# Altium PCB STlinkv21.PcbDoc
Units mil, origin at the board's own origin, x right, y up, seen from the top; angles counter-clockwise.
Board outline 1970 x 575 mil, 2 copper layers (Top Layer, Bottom Layer); 50 components, 45 nets, 164 pads, 77 vias.
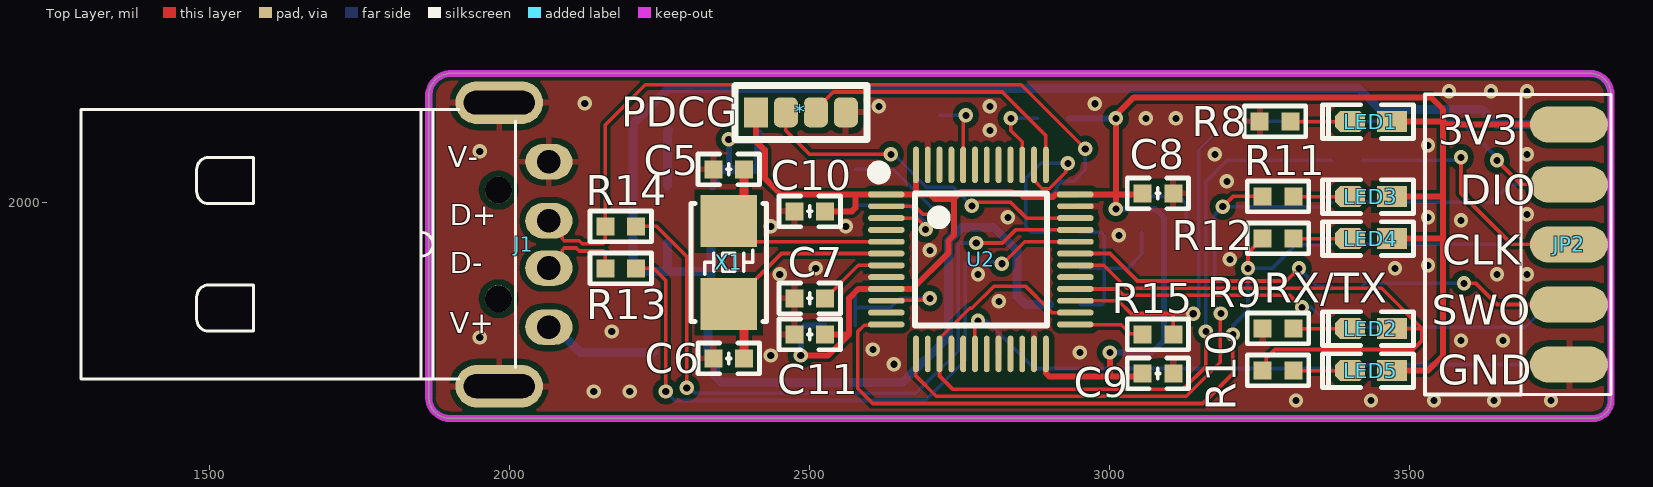
[diagram p0: Top Layer view]
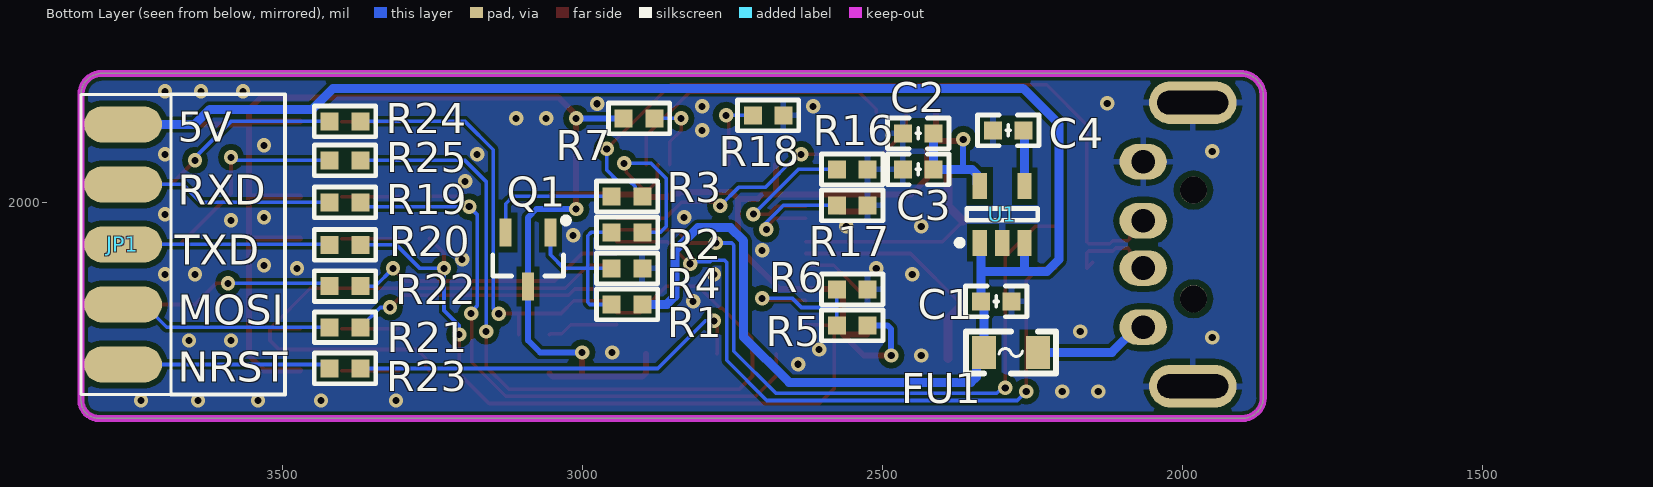
[diagram p1: Bottom Layer view, seen from below]
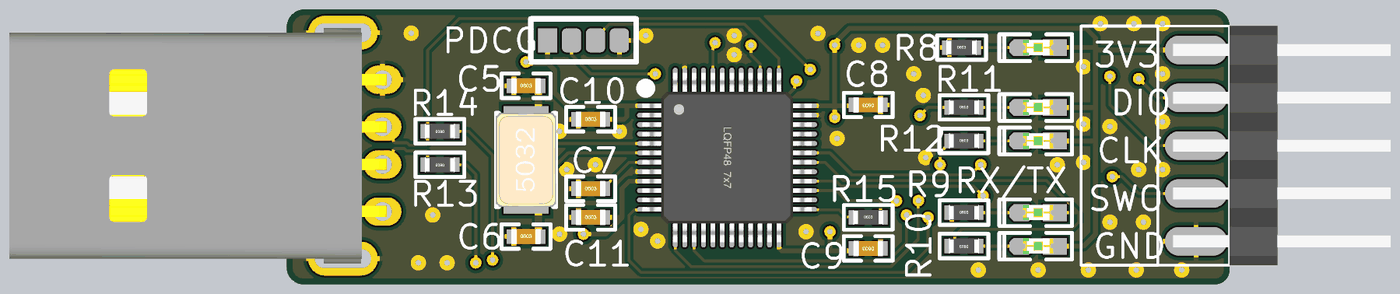
[diagram p2: 3D render of the assembled board from above, using the file's embedded part models]
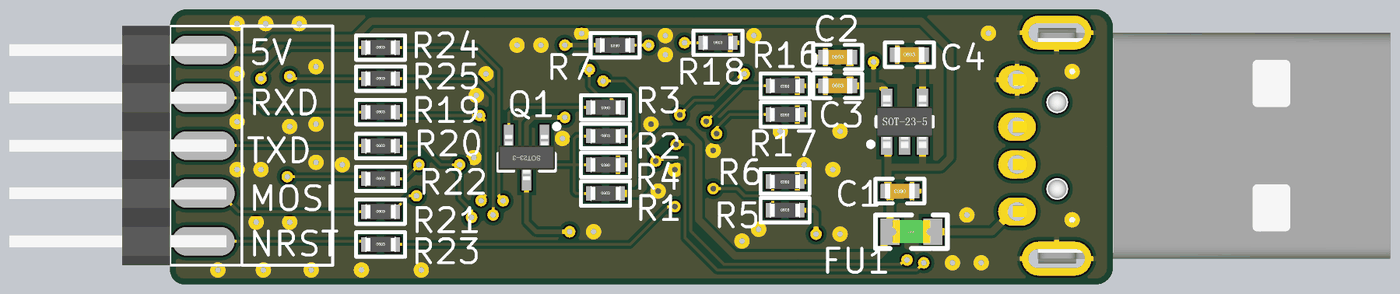
[diagram p3: 3D render of the assembled board from below, using the file's embedded part models]

## Layer stack, top to bottom
Top Solder: solder mask 0.4, Solder Resist, Dk 3.5
Top Layer: signal copper 1.4
Dielectric 1: dielectric 12.6, FR-4, Dk 4.8
Bottom Layer: signal copper 1.4
Bottom Solder: solder mask 0.4, Solder Resist, Dk 3.5

## Board outline
1865,1675 ccw(c1900,1675) 1900,1640 3805,1640 ccw(c3805,1670) 3835,1670 3835,2180 ccw(c3800,2180) 3800,2215 1905,2215 ccw(c1902.5,2177.5) 1865,2180

## Design rules (kind name [scope] priority, off if disabled: settings)
Clearance [All] p1: gap=10 ignorepadtopadclearanceinfootprint=TRUE except(0: Arc-Hole Track-Hole SMDPad-Hole THPad-Hole Via-Hole Fill-Hole Poly-Hole Region-Hole Text-Hole; 6: Arc-Arc Arc-Track Arc-SMDPad Arc-THPad Arc-Via Arc-Fill Arc-Poly Arc-Region Track-Track Track-SMDPad Track-THPad Track-Via Track-Fill Track-Poly Track-Region SMDPad-SMDPad SMDPad-THPad SMDPad-Via THPad-THPad THPad-Via Via-Via)
DiffPairsRouting [All] p1: maxlimit=10 minlimit=6 mostfreqgap=6 toplayer_minwidth=6 toplayer_maxwidth=15 toplayer_prefwidth=6 bottomlayer_minwidth=6 bottomlayer_maxwidth=15 bottomlayer_prefwidth=6 maxuncoupledlength=500
PlaneClearance [All] p1: clearance=10
PolygonConnect [All] p1: thpad.connectstyle=Relief thpad.reliefconductorwidth=10 thpad.reliefentries=4 thpad.polygonreliefangle="90 Angle" thpad.airgapwidth=10 smdpad.connectstyle=Relief smdpad.reliefconductorwidth=10 smdpad.reliefentries=4 smdpad.polygonreliefangle="90 Angle" smdpad.airgapwidth=10 via.connectstyle=Direct via.reliefconductorwidth=10 via.reliefentries=4 via.polygonreliefangle="90 Angle" via.airgapwidth=10
RoutingVias [All] p1: holewidth=12 width=24 viastyle="Through Hole" minholewidth=12 minwidth=24 maxholewidth=12 maxwidth=24
SolderMaskExpansion [All] p1: expansion=4 istentingtop=FALSE
UnRoutedNet [All] p1: checkbadconnections=TRUE
Width Width_3 [InNet('NetFU1_1')] p1: maxlimit=30 minlimit=10 preferedwidth=15
Width Width_2 [InNet('5V')] p2: maxlimit=30 minlimit=10 preferedwidth=15
Width Width_1 [InNet('3.3V')] p3: maxlimit=30 minlimit=10 preferedwidth=15
Width [InNetClass('All Nets')] p4: maxlimit=30 minlimit=6 preferedwidth=6
27 further rules are at their usual default settings.

## Classes and differential pairs
differential pair USB: +USB_P -USB_N

## Components (designator, comment, footprint, x,y, rotation, side; value= is the part's Value field where it differs from the comment)
* "JP3" JP4 2410,2150 r0 top
C1 "104" "C 0603_L" 2310,1835 r0 bottom
C2 "104" "C 0603_L" 2440,2115 r180 bottom
C3 "10uF" "C 0603_L" 2440,2055 r180 bottom
C4 "104" "C 0603_L" 2290,2120 r180 bottom
C5 "22pF" "C 0603_L" 2365,2055 r0 top
C6 "22pF" "C 0603_L" 2365,1740 r0 top
C7 "104" "C 0603_L" 2500,1840 r0 top
C8 "104" "C 0603_L" 3080,2015 r180 top
C9 "104" "C 0603_L" 3080,1715 r180 top locked
C10 "104" "C 0603_L" 2500,1985 r0 top
C11 "104" "C 0603_L" 2500,1780 r0 top
FU1 "500mA" "FU 0805" 2285.71,1750 r0 bottom
J1 "USB?" USB-A 1715,1920 r180 top
JP1 "P_BOTTOM" JP5Bottom 3765,2130 r0 top
JP2 "P_TOP" JP5TOP 3765,1730 r90 top
LED1 "RED" "LED 0603B" 3435,2135 r180 top
LED2 "橙色" "LED 0603B" 3435,1790 r180 top
LED3 "绿色" "LED 0603B" 3435,2010 r180 top
LED4 "橙色" "LED 0603B" 3435,1940 r180 top
LED5 "蓝色" "LED 0603B" 3435,1720 r180 top
Q1 "SS8050" SOT23-3N 3090,1905 r0 bottom locked
R1 "10K" "R 0603_L" 2925,1830 r180 bottom
R2 "100" "R 0603_L" 2925,1950 r180 bottom
R3 "1.5K" "R 0603_L" 2925,2010 r0 bottom
R4 "36K" "R 0603_L" 2925,1890 r0 bottom
R5 "4.7K" "R 0603_L" 2550.01,1795 r180 bottom
R6 "4.7K" "R 0603_L" 2549.99,1855 r0 bottom
R7 "4.7K" "R 0603_L" 2905,2140 r0 bottom
R8 "1K" "R 0603_L" 3275.01,2135 r0 top
R9 "1K5" "R 0603_L" 3280.01,1790 r0 top locked
R10 "1K" "R 0603_L" 3280,1720 r180 top locked
R11 "1K5" "R 0603_L" 3280.01,2010 r0 top
R12 "100" "R 0603_L" 3280,1940 r0 top
R13 "22" "R 0603_L" 2185,1890 r180 top
R14 "22" "R 0603_L" 2185,1960 r180 top
R15 "100" "R 0603_L" 3080,1780 r0 top locked
R16 "10K" "R 0603_L" 2549.99,2055 r0 bottom
R17 "10K" "R 0603_L" 2549.99,1995 r0 bottom
R18 "10K" "R 0603_L" 2690,2145 r180 bottom
R19 "22" "R 0603_L" 3395,2000 r180 bottom
R20 "22" "R 0603_L" 3395,1929.17 r180 bottom
R21 "22" "R 0603_L" 3395,1791.94 r180 bottom
R22 "22" "R 0603_L" 3395,1860.56 r180 bottom
R23 "22" "R 0603_L" 3395,1723.33 r180 bottom
R24 "22" "R 0603_L" 3395,2135 r180 bottom
R25 "22" "R 0603_L" 3395,2070 r180 bottom
U1 "SPX3819" SOT-23-5 2300,1980 r90 top
U2 "STM32F103CB" "LQFP48 7X7_L" 2785,1905 r270 top locked
X1 "8MHz" "OSC 5032-2P" 2365,1900 r90 top

## Footprints (in the part's own frame and the unit in brackets; to place one, negate y for a bottom-side part, rotate by r counter-clockwise, add the part's x,y. Pads: shape width x height; smd on the part's side, far side on the other; paste and mask are expansions set on the pad)
"C 0603_L" [mil] "无极性贴片电容"
  rect 30x30 smd: 1(-25.59,0) 2(25.59,0)
  silkscreen extent -51,-26 51,26, body extent -31,-16 31,16, height 32
"FU 0805" [mil] "贴片保险丝"
  rect 40x55 smd: 1(-45,0) 2(45,0)
  silkscreen extent -75,-35 75,35, body extent -39,-24 39,24, height 20
JP4 [mil]
  rect 40x50 smd: 1(0,0)
  rrect50% 40x50 smd: 2(50,0) 3(100,0) 4(150,0)
  silkscreen extent -35,-45 185,45
JP5Bottom [mil]
  oval 130x60 smd far side: 1(0,0) 2(0,-100) 3(0,-200) 4(0,-300) 5(0,-400)
  body extent -48,-450 406,50, height 70
JP5TOP [mil]
  oval 60x130 smd: 1(0,0) 2(100,0) 3(200,0) 4(300,0) 5(400,0)
  silkscreen extent -50,-70 450,80, body extent -50,-406 450,48, height 70
"LED 0603B" [mil] "蓝色0603LED"
  rect 50x35 smd: 1(-35,0.26)
  oct 50x35 smd: 2(35,0.26)
  silkscreen extent -71,-28 81,28, body extent -31,-16 32,16, height 24
"LQFP48 7X7_L" [mm] "48脚，体宽7x7mm，脚距0.5mm"
  oval 0.25x1.55 smd: 1(-2.75,-4) 2(-2.25,-4) 3(-1.75,-4) 4(-1.25,-4) 5(-0.75,-4) 6(-0.25,-4) 7(0.25,-4) 8(0.75,-4) 9(1.25,-4) 10(1.75,-4) 11(2.25,-4) 12(2.75,-4) 25(2.75,4) 26(2.25,4) 27(1.75,4) 28(1.25,4) 29(0.75,4) 30(0.25,4) 31(-0.25,4) 32(-0.75,4) 33(-1.25,4) 34(-1.75,4) 35(-2.25,4) 36(-2.75,4)
  oval 1.55x0.25 smd: 13(4,-2.75) 14(4,-2.25) 15(4,-1.75) 16(4,-1.25) 17(4,-0.75) 18(4,-0.25) 19(4,0.25) 20(4,0.75) 21(4,1.25) 22(4,1.75) 23(4,2.25) 24(4,2.75) 37(-4,2.75) 38(-4,2.25) 39(-4,1.75) 40(-4,1.25) 41(-4,0.75) 42(-4,0.25) 43(-4,-0.25) 44(-4,-0.75) 45(-4,-1.25) 46(-4,-1.75) 47(-4,-2.25) 48(-4,-2.75)
  silkscreen extent -3.93,-4.57 2.79,2.79, body extent -4.5,-4.5 4.5,4.5, height 1.45
"OSC 5032-2P" [mm] "5mm*3.2mm*0.8mm(长*宽*高)"
  rect 2.2x2.4 smd: 1(-1.75,0) 2(1.75,0)
  silkscreen extent -2.5,-1.6 2.5,1.6, body extent -2.5,-1.6 2.5,1.6, height 0.86
"R 0603_L" [mil] "1/10W贴片电阻"
  rect 30x30 smd: 1(-25.59,0) 2(25.59,0)
  silkscreen extent -51,-26 51,26, body extent -31,-16 31,16, height 16
SOT23-3N [mm] "3x1.3x1mm(长宽高)"
  rect 0.5x1.2 smd: 1(-0.95,-1.143) 2(0.95,-1.143) 3(0,1.143)
  silkscreen extent -1.72,-1.78 1.5,0.7, body extent -1.5,-1.2 1.5,1.2, height 1.05
SOT-23-5 [mm]
  rect 1.1x0.6 smd far side: 1(-1.2,-0.95) 2(-1.2,0) 3(-1.2,0.95) 4(1.2,0.95) 5(1.2,-0.95)
  body extent -1.4,-1.45 1.4,1.45, height 1.2
USB-A [mm]
  oval 2x1.5 hole 1: 1(-8.893,3.246) 2(-8.893,0.746) 3(-8.893,-1.254) 4(-8.893,-3.754)
  oval 3.7x1.8 hole 1 slot 3 at 0 deg: 5(-6.793,-6.254) 6(-6.793,5.746)
  round 1.143 hole 1.143 unplated: ""(-6.763,-2.554) ""(-6.763,2.046)
  silkscreen extent -7.49,-5.96 10.91,5.44, body extent -9.12,-6.5 10.91,6, height 3.12

## Part data
*: library part JP?
C1 C2 C3 C4 C5 C6 C7 C8 C9 C10 C11: library part C, "无极性贴片电容", BOM名称=无极性贴片电容, 学习资源=www.ooocke.com, 版权归属=源创客
FU1: library part FU, "贴片保险丝", BOM名称=贴片保险丝, 学习资源=www.ooocke.com, 版权归属=源创客
JP1 JP2: library part "Header 5", "5P接插件", BOM名称=5P接插件, 学习资源=www.ooocke.com, 版权归属=源创客
LED1 LED2 LED3 LED4 LED5: library part LED-SMD, "贴片LED", BOM名称=贴片LED, 学习资源=www.ooocke.com, 版权归属=源创客
Q1: library part 8050-SMD, "高频放大-NPN型", BOM名称=高频放大-NPN型, 学习资源=www.ooocke.com, 属性="40V 1.5A 1W 100MHZ", 版权归属=源创客
R1 R2 R3 R4 R5 R6 R7 R8 R9 R10 R11 R12 R13 R14 R15 R16 R17 R18 R19 R20 R21 R22 R23 R24 R25: library part R, "贴片电阻", BOM名称=贴片电阻, 学习资源=www.ooocke.com, 版权归属=源创客
U2: library part STM32F103C8, "Flaah:64/RAM:20/IO:36", BOM名称=32位STM单片机, 学习资源=www.ooocke.com, 版权归属=源创客
X1: library part XTAL-2P, "2脚无源脚晶振", BOM名称=2脚无源脚晶振, 学习资源=www.ooocke.com, 版权归属=源创客

## Via types
v1: diameter 24, hole 12, Top Layer to Bottom Layer, 77 vias

## Nets (pads, with @x,y where several pads share a name; then routed paths per layer and width w, separated by ;. In a path a pad name is that pad's centre, name@x,y a point inside that pad or via, vN(x,y) a via of type N, cw(c..) or ccw(c..) an arc to the next point about the centre after c; other vN are vias at no path point)
3.3V: *.1 C2.2 C3.2 C8.2 C9.2 C10.2 C11.2 JP2.5 LED1.1 LED3.1 LED4.1 LED5.1 Q1.3 R5.2 R7.2 U1.5 U2.1 U2.9 U2.24 U2.36 U2.48 | length 4120.2
  Top Layer w10: v1(2365,2105) 2367.68,2102.32 2377.58,2102.32 2377.68,2102.22 2410,2102.22 ; *.1 2410,2102.22 ; v1(2485,1745) 2530.47,1745 2565.47,1780 ; C11.2 2565.47,1780 ; C10.2 2570,1985 2575.86,1990.86 2575.86,2013.27 ; 2549.14,2013.19 2451.81,2013.19 2425,2040 2425,2087.22 2410,2102.22 ; 2549.14,2013.27 2575.86,2013.27 ; U2.48 2676.73,2018.27 2681.73,2013.27 ; U2.24 2893.27,1715.86 2899.13,1710 3000,1710 ; v1(3000,1750) 3000,1710 ; v1(3010,1989) 3010,2013.27 ; C8.2@3051.15,2013.27 3010,2013.27 ; C9.2 3049.41,1710 3000,1710 ; LED5.1 3529.74,1719.74 3555,1745 3555,1940 ; LED4.1 3554.74,1939.74 3555,1940 ; LED3.1 3554.74,2009.74 3555,2010 ; LED1.1 3470.25,2135 3555,2135 ; JP2.5 3560,2130 3555,2135 ; 2565.47,1780 2565.47,1840.47 2580.71,1855.71 2627.46,1855.71 U2.9 2670.79,1855.79 2730.63,1915.63 2730.63,1935.75 2740,1945.12 2740,2005.67 ; 2575.86,2013.27 U2.1 2681.73,2013.27 ; 2681.73,2013.27 2700.04,2013.27 2707.63,2005.67 2740,2005.67 ; 2740,2005.67 2751.59,2017.26 2821.1,2017.26 2836.22,2017.26 2838.47,2015 2850,2015 2856.05,2008.95 2904.83,2008.95 2909.07,2013.19 2942.39,2013.19 U2.36 3010,2013.27 ; 3010,2013.27 v1(3010,2140) 3010,2145 3040,2175 3535,2175 3555,2155 3555,2135 ; 3555,1940 3555,2010 ; 3555,2010 3555,2130 3555,2135
  Bottom Layer w10: v1(2365,2105) 2365,2060 2370,2055 ; v1(2485,1745) 2485,1789.14 2490.86,1795 R5.2 ; R7.2 v1(3010,2140) ; v1(3000,1750) 3070,1750 3090,1770 Q1.3 3090,1975 3076,1989 v1(3010,1989)
  Bottom Layer w15: U1.5 2341.72,2031.57 2341.72,2046.21 2350.51,2055 2370,2055 C3.2 C2.2
5V: C1.2 FU1.2 JP1.1 R1.2 U1.1 U1.3 | length 3109.3
  Bottom Layer w15: U1.3 2262.6,1885 ; C1.2@2330.59,1835 2330.59,1750.13 2343.21,1737.5 2343.21,1708.79 2352,1700 2655,1700 2730.63,1775.63 2730.63,1935.75 2752.81,1957.93 2807.07,1957.93 2845.5,1919.5 2845.5,1843.3 2858.81,1830 R1.2 ; C1.2 2335,1835.59 2335,1885 ; U1.1 2335,1930.36 2335,1885 ; JP1.1 3645,2130 3620,2155 3449.68,2155 3414.68,2190 2265,2190 2205,2130 2205,1905 2225,1885 2262.6,1885 ; 2262.6,1885 2335,1885
BOOT0: R18.1 U2.44 | length 128.8
  Top Layer w6: U2.44 2755.47,2135.6 2760,2140.13 v1(2760,2145)
  Bottom Layer w6: R18.1 v1(2760,2145)
GND: *.4 C1.1 C2.1 C3.1 C4.1 C5.1 C6.1 C7.1 C8.1 C9.1 C10.1 C11.1 J1.4 J1.5 J1.6 JP2.1 R4.1 R6.1 R8.1 R9.1 R16.1 R17.1 R18.2 U1.2 U2.8 U2.20 U2.23 U2.35 U2.47
  other v1: 3310,1670 3435,1670 3540,1670 3640,1670 3735,1670 2140,1685 2200,1685 2640,1730.5 2435,1745 2950,1750 2605,1755 3585,1770 3655,1770 1950,1775 2170,1785 2815,1835 2450,1880 2780.13,1880 3645,1880 3695,1880 2510,1890 3475,1890 3530,1895 3200,1905 2700,1920 3015,1945 2435,1960 2560,1960 3585,1970 2830,1975 3530,1975 3695,1980 3195,2035 3175,2080 3695,2080 1950,2085 3530,2095 2800,2120 3060,2140 3110,2140 2615,2160 2800,2160 2975,2164.5 2125,2165 3565,2185 3635,2185 3695,2185
NetC4_2: C4.2 U1.4 | length 93.5
  Bottom Layer w15: U1.4 2262.6,2118.19 C4.2
NetC7_2: C7.2 U2.7 | length 124.8
  Top Layer w6: C7.2 2580.75,1895.16 U2.7
NetFU1_1: FU1.1 J1.1 | length 193.1
  Bottom Layer w15: J1.1 2074.96,1792.2 2117.17,1750 FU1.1
NetLED1_2: LED1.2 R8.2 | length 99.5
  Top Layer w6: R8.2 3300.85,2134.74 LED1.2
NetLED2_2: LED2.2 R9.2 | length 94.5
  Top Layer w6: R9.2 3305.85,1789.74 LED2.2
NetLED3_2: LED3.2 R11.2 | length 94.5
  Top Layer w6: R11.2 3305.85,2009.74 LED3.2
NetLED4_2: LED4.2 R12.2 | length 94.5
  Top Layer w6: R12.2 3305.84,1939.74 LED4.2
NetLED5_2: LED5.2 R10.1 | length 94.5
  Top Layer w6: R10.1 3305.85,1719.74 LED5.2
NetQ1_1: Q1.1 R1.1 R2.1 R4.2 | length 343.6
  Bottom Layer w6: R1.1 2987.23,1830 2990.74,1833.51 2990.74,1890 ; R4.2 2990.74,1890 ; R2.1 2985,1950 2990.74,1944.26 2990.74,1890 ; Q1.1 3052.6,1912.6 3030,1890 2990.74,1890
NetQ1_2: Q1.2 R3.2 | length 229.6
  Bottom Layer w6: R3.2 3115,2010 3127.4,1997.6 Q1.2
NetR5_1: R5.1 R6.2 U2.10 | length 264.7
  Top Layer w6: U2.10 2628.27,1836.84 2696.84,1836.84 v1(2700,1840)
  Bottom Layer w6: R5.1 2575.6,1824.99 ; R6.2 2575.6,1824.99 ; v1(2700,1840) 2649.35,1840 2634.34,1824.99 2575.6,1824.99
NetR13_1: R13.1 U2.32 | length 1141.3
  Top Layer w6: R13.1 2240,1890 2260,1870 v1(2260,1685) ; v1(2820,1897.7) 2821.22,1897.7 2858.04,1934.53 U2.32
  Bottom Layer w6: v1(2260,1685) 2275,1670 2692.2,1670 2759.13,1736.92 2759.13,1899.99 2762.64,1903.5 2783.92,1903.5 2786.42,1901 2816.7,1901 v1(2820,1897.7)
NetR14_1: R14.1 U2.33 | length 1191.6
  Top Layer w6: R14.1 2245,1960 2295,1910 v1(2295,1691) ; v1(2777.43,1932.43) 2820.89,1932.43 2842.68,1954.21 U2.33
  Bottom Layer w6: v1(2295,1691) 2299.87,1691 2308.87,1682 2677,1682 2747.13,1752.13 2747.13,1928.91 2750.64,1932.43 v1(2777.43,1932.43)
NetR16_2: R16.2 U2.2 | length 262
  Top Layer w6: U2.2 2675.53,1993.58 2688.57,1980.54 v1(2714.46,1980.54)
  Bottom Layer w6: R16.2 2640,2055 v1(2714.46,1980.54)
NetR17_2: R17.2 U2.3 | length 218.3
  Top Layer w6: U2.3 2678.1,1973.9 2692.88,1959.12 v1(2692.88,1955.01)
  Bottom Layer w6: R17.2 2665,1995 2695,1965 2695,1957.13 v1(2692.88,1955.01)
OS_IN: C5.2 U2.5 X1.2 | length 373.5
  Top Layer w6: X1.2 2399.37,1934.53 U2.5
  Top Layer w15: X1.2 2390.59,1994.48 C5.2
OS_OUT: C6.2 U2.6 X1.1 | length 398.9
  Top Layer w6: X1.1 2368.94,1831.1 2452.68,1914.84 U2.6
  Top Layer w15: X1.1 2390.59,1805.52 C6.2
P_MOSI: JP1.4 R21.1 | length 360.2
  Bottom Layer w6: R21.1 3691.94,1791.94 3730,1830 JP1.4
P_NRST: JP1.5 R23.1 | length 347.2
  Bottom Layer w6: R23.1 3427.26,1730 JP1.5
P_RXD: JP1.2 R19.1 | length 356.8
  Bottom Layer w6: R19.1 3635,2000 3665,2030 JP1.2
P_SWCLK: JP2.3 R25.1 | length 441.7
  Top Layer w6: v1(3585,2075) 3585,2015 3670,1930 JP2.3
  Bottom Layer w6: R25.1 3580,2070 v1(3585,2075)
P_SWDIO: JP2.4 R24.1 | length 385.8
  Top Layer w6: v1(3645,2070) 3685,2030 JP2.4
  Bottom Layer w6: R24.1 3585,2135 v1@3645,2075
P_SWO: JP2.2 R22.1 | length 364.9
  Top Layer w6: v1(3590,1865) 3610,1865 3645,1830 JP2.2
  Bottom Layer w6: R22.1 3430.04,1870 3435.04,1865 v1(3590,1865)
R_TXD: JP1.3 R20.1 | length 344.8
  Bottom Layer w6: R20.1 3421.43,1930 JP1.3
STA_LED: LED2.1 R10.2 U2.30 | length 985.7
  Top Layer w6: U2.30 2989.84,1895.16 3028,1857 3452.74,1857 3520,1789.74 ; R10.2 3260.49,1726.08 3260.49,1740.49 3275,1755 3505,1755 3520,1770 3520,1789.74 ; LED2.1 3520,1789.74
SWCLK0: *.3 U2.37 | length 479.3
  Top Layer w6: *.3 2510,2155 2539,2184 2820.7,2184 2893.27,2111.43 U2.37
SWDIO0: *.2 U2.34 | length 577.7
  Top Layer w6: *.2 2460,2120 2500,2080 v1(2635,2080) ; v1(2770,1994.26) 2774.87,1994.26 2780.61,2000 2835,2000 2861.1,1973.9 U2.34
  Bottom Layer w6: v1(2635,2080) 2639.87,2080 2646.22,2073.65 2646.35,2073.65 2695,2025 2739.26,2025 v1(2770,1994.26)
SWO0: R7.1 U2.39 | length 129.8
  Top Layer w6: v1(2835,2140) 2835,2120 2853.9,2101.1 U2.39
  Bottom Layer w6: v1(2835,2140) R7.1
T_JTCK: R25.2 U2.15 U2.26 | length 1343.7
  Top Layer w6: U2.26 2903.56,1816.42 2896.46,1823.52 2896.46,1823.85 2860.31,1860 2806.26,1860 2769.8,1823.54 2766.51,1823.54 2717.36,1774.38 2717.36,1748.79 U2.15 2716.1,1710.74 2737.85,1689 3122.32,1689 3160,1726.68 v1(3160,1785)
  Bottom Layer w6: v1(3160,1785) 3160,2035 3195,2070 R25.2
T_JTDI: U2.17
T_JTDO: U2.16
T_JTMS: R15.2 R24.2 U2.27 | length 758.8
  Top Layer w6: U2.27 3013.9,1836.1 3035,1815 3105.59,1815 ; R15.2 3105.59,1815 ; v1(3139,1814.63) 3138.63,1815 3105.59,1815
  Bottom Layer w6: v1(3139,1814.63) 3140.72,1816.35 3141.35,1816.35 3148,1823 3148,2088 3195,2135 R24.2
T_MOSI: R21.2 U2.28 | length 453.4
  Top Layer w6: U2.28 3012.24,1855.79 3023.03,1845 3300,1845 v1(3320,1825)
  Bottom Layer w6: v1(3320,1825) 3336.35,1825 R21.2
T_NRST: R23.2 U2.18 | length 680.1
  Top Layer w6: U2.18 2775.08,1747.61 2775.08,1799.02 2776.61,1799.02 v1(2780.13,1802.54)
  Bottom Layer w6: v1(2780.13,1802.54) 2794.89,1802.54 2874.1,1723.33 R23.2
T_RXD: R11.1 R19.2 U2.13 | length 1108.5
  Top Layer w6: U2.13 2676.73,1710.74 2710.48,1677 3127.29,1677 3184,1733.71 3184,1814 v1(3185,1815) ; v1(3188,1993) 3205,2010 R11.1
  Bottom Layer w6: v1(3185,1815) 3185,1817.51 3175,1827.51 3175,1980 v1(3188,1993) 3362.42,1993 R19.2
T_SWDIO_IN: R15.1 U2.25 | length 118.9
  Top Layer w6: U2.25 2943.2,1796 3019,1796 3033.92,1781.08 3053.32,1781.08 R15.1
T_SWO: R22.2 U2.31 | length 467.6
  Top Layer w6: U2.31 3000.16,1914.84 3046,1869 3294,1869 v1(3315,1890)
  Bottom Layer w6: v1(3315,1890) 3344.45,1860.55 R22.2 R22.2@3368.86,1860
T_TXD: R12.1 R20.2 U2.12 | length 1204.6
  Top Layer w6: U2.12 2626.8,1796 2598.49,1796 2597.97,1795.48 2590.48,1795.48 2580,1785 2580,1690 2605,1665 3155,1665 3205,1715 v1(3205,1780) ; v1(3230,1890) 3230,1915.59 R12.1
  Bottom Layer w6: v1(3205,1780) 3205,1795 3230,1820 v1(3230,1890) 3270,1890 3309.16,1929.16 R20.2
USB_N: J1.2 R13.2 | length 155.5
  Top Layer w6: J1.2 2065.12,1895.14 2087.59,1917.62 2087.59,1920.49 2091.11,1924 2110.8,1924 2115.79,1919 2155.9,1919 2159.41,1915.49 R13.2 R13.2@2149.51,1899.9
USB_P: J1.3 R3.1 R14.2 | length 1297.7
  Top Layer w6: J1.3 2065.12,1964.86 2087.59,1942.38 2087.59,1939.51 2091.11,1936 2115.77,1936 2120.76,1931 2155.9,1931 2159.41,1934.52 R14.2 2159.41,2129.41 2226,2196 2852.07,2196 v1(2958.88,2089.19)
  Bottom Layer w6: R3.1 2911.41,2022 2911.41,2026.41 2920,2035 2940,2035 2958.88,2053.88 v1(2958.88,2089.19)
USB_RENM: R2.2 U2.38 | length 315.6
  Top Layer w6: U2.38 2874.84,2061.21 2874.84,2035.62 2887.5,2022.95 2899.03,2022.95 2926.56,2050.47 2926.56,2061.56 v1(2930,2065)
  Bottom Layer w6: R2.2 2870,1950 2860,1960 2860,2040 2885,2065 v1(2930,2065)
pads on no net: J1. U2.4 U2.11 U2.14 U2.19 U2.21 U2.22 U2.29 U2.40 U2.41 U2.42 U2.43 U2.45 U2.46

## Polygon pours and split planes (outlines as drawn)
GND on Top Layer "GND_L01_P000" (solid, pour order 0): 1865,2215 3837.5,2215 3837.5,1640 1865,1640
GND on Bottom Layer "GND_L02_P001" (solid, pour order 1): 1865,2215 3835,2215 3835,1640 1865,1640

## Keep-outs
Keep-Out Layer:
  the board outline again, w11.81

## Silkscreen, mask and mechanical layers (free items; w line width, h text height)
Top Overlay:
  lines w6: 3685,1680 3525,1680 3525,2180 3685,2180
  text "PDCG" at 2186,2126 h50
  text "3V3" at 3547.42,2096 h50
  text "DIO" at 3582.56,1996 h50
  text "CLK" at 3553.71,1896 h50
  text "RX/TX" at 3256,1833.14 h50
  text "SWO" at 3536,1796 h50
  text "GND" at 3546,1696 h50
Bottom Overlay:
  lines w6: 3685,1680 3495,1680 3495,2180 3685,2180
  text "5V" at 3674,2101 h50
  text "RXD" at 3674,1996 h50
  text "TXD" at 3679,1896 h50
  text "MOSI" at 3674,1796 h50
  text "NRST" at 3674,1701 h50

## Text inside footprints (layer, text, board x,y; h text height)
J1: Top Overlay "D+" at 1900,1950 h60; Top Overlay "V+" at 1900,1770 h60; Top Overlay "V-" at 1897,2047.13 h60; Top Overlay "D-" at 1900,1870 h60